# Altium PCB Main.PcbDoc
Units mil, origin at the board's own origin, x right, y up, seen from the top; angles counter-clockwise.
Board outline 900 x 2810 mil, 2 copper layers (Top Layer, Bottom Layer); 34 components, 43 nets, 176 pads, 34 vias.
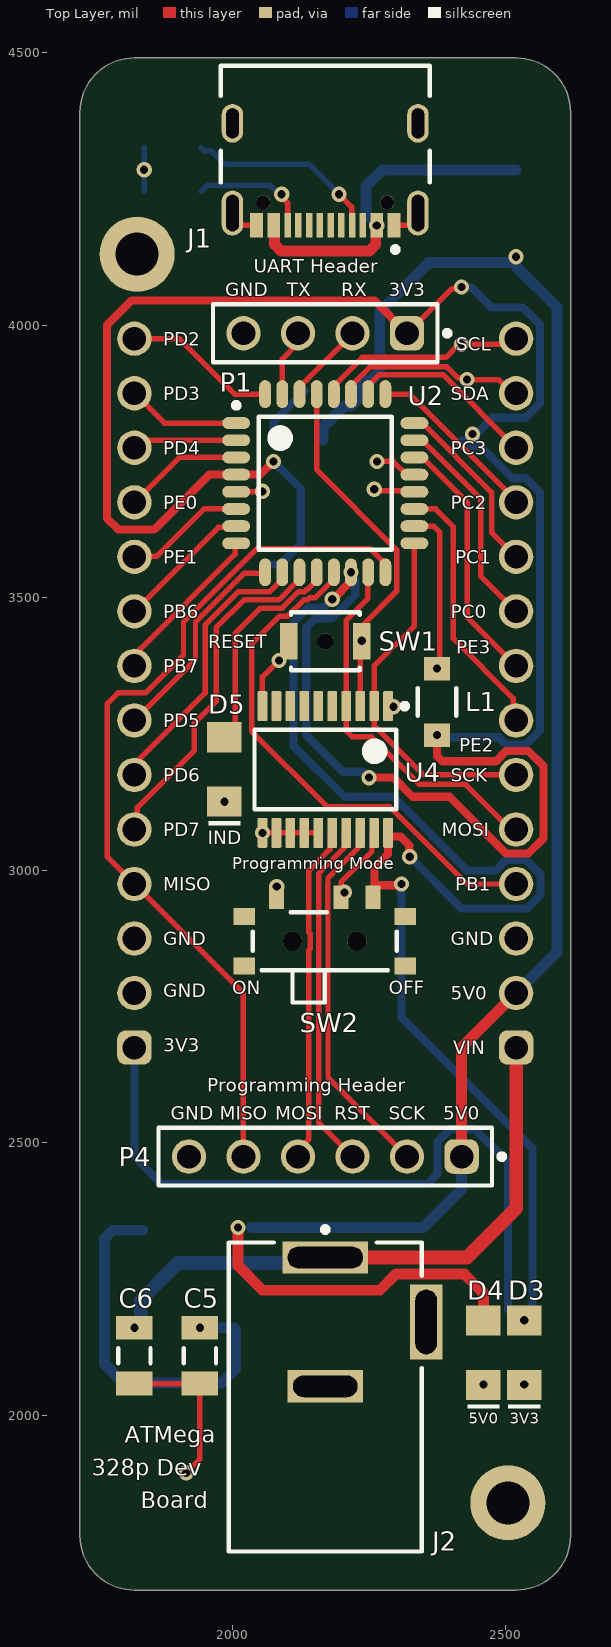
[diagram p0: Top Layer view]
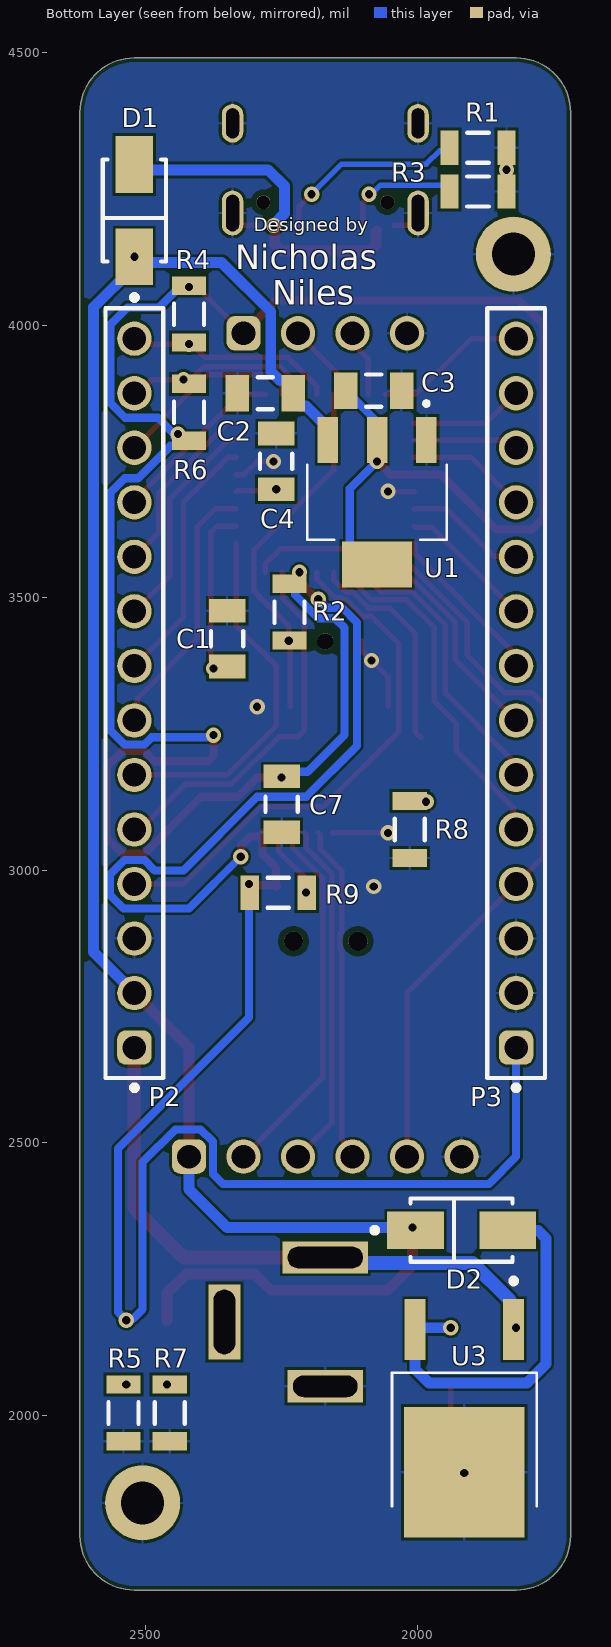
[diagram p1: Bottom Layer view, seen from below]
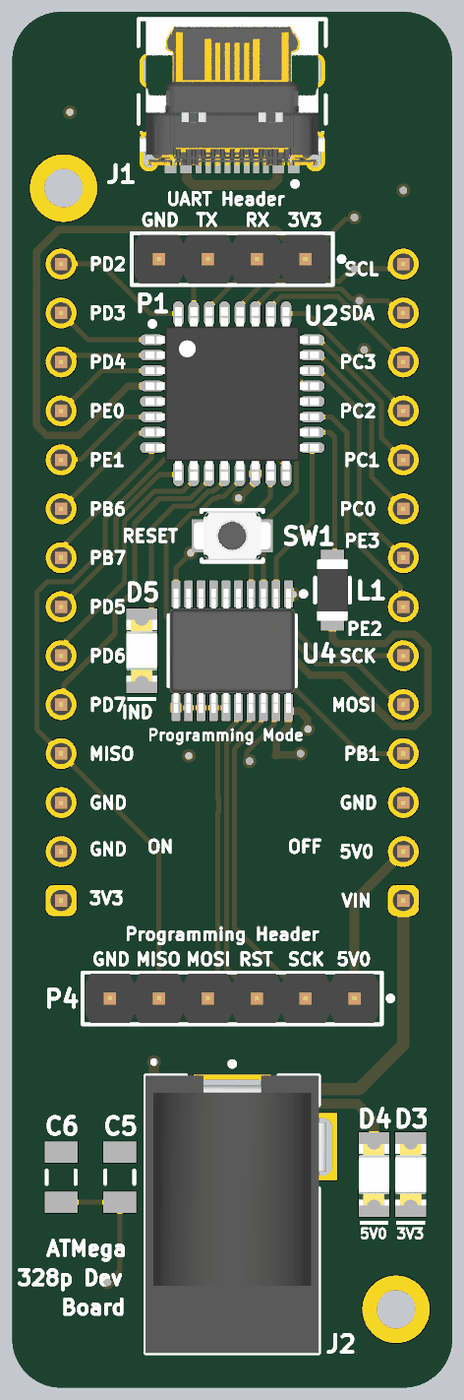
[diagram p2: 3D render of the assembled board from above, using the file's embedded part models]

## Layer stack, top to bottom
Top Solder: solder mask 0.4, Solder Resist, Dk 3.5
Top Layer: signal copper 1.4
Dielectric 1: dielectric 12.6, FR-4, Dk 4.8
Bottom Layer: signal copper 1.4
Bottom Solder: solder mask 0.4, Solder Resist, Dk 3.5

## Board outline
1720,1780 1720,4390 cw(c1820,4390) 1820,4490 2520,4490 cw(c2520,4390) 2620,4390 2620,1780 cw(c2520,1780) 2520,1680 1820,1680 cw(c1820,1780)

## Design rules (kind name [scope] priority, off if disabled: settings)
BoardOutlineClearance [All] p1: gap=7.87 ignorepadtopadclearanceinfootprint=FALSE
Clearance [All] p1: gap=5 ignorepadtopadclearanceinfootprint=TRUE except(10: Arc-Hole Track-Hole SMDPad-Hole THPad-Hole Via-Hole Fill-Hole Poly-Hole Region-Hole Text-Hole)
ComponentClearance [All] p1: gap=5 collisioncheckmode=3 verticalgap=5 showdistances=TRUE
DiffPairsRouting [All] p1: maxlimit=10 minlimit=5 mostfreqgap=5 toplayer_minwidth=5 toplayer_maxwidth=1000 toplayer_prefwidth=5 bottomlayer_minwidth=5 bottomlayer_maxwidth=1000 bottomlayer_prefwidth=5 maxuncoupledlength=500
Height [All] p1: minheight=0 maxheight=71497.94 prefheight=500
HoleSize [All] p1: absolutevalues=TRUE maxlimit=248.03 minlimit=11.81 maxpercent=80.000 minpercent=20.000
HoleToHoleClearance [All] p1: gap=10 allowstackedmicrovias=FALSE
MinimumAnnularRing [All] p1: minimumring=6
MinimumSolderMaskSliver [All] p1: minsoldermaskwidth=6
PlaneClearance [All] p1: clearance=5
PlaneConnect PlaneConnectPowerPads [InPadClass('PowerPads')] p1: planeconnectstyle=Direct reliefexpansion=20 reliefentries=4 reliefconductorwidth=10 reliefairgap=10
PlaneConnect [All] p2: pad.planeconnectstyle=Relief pad.reliefexpansion=11.81 pad.reliefentries=4 pad.reliefconductorwidth=5 pad.reliefairgap=5 via.planeconnectstyle=Direct via.reliefexpansion=11.81 via.reliefentries=4 via.reliefconductorwidth=5 via.reliefairgap=5
PolygonConnect PolygonConnectPowerPads [All vs (InPadClass('PowerPads'))] p1: connectstyle=Direct reliefconductorwidth=10 reliefentries=4 polygonreliefangle="90 Angle" airgapwidth=10
PolygonConnect [All] p2: thpad.connectstyle=Relief thpad.reliefconductorwidth=5 thpad.reliefentries=4 thpad.polygonreliefangle="90 Angle" thpad.airgapwidth=5 smdpad.connectstyle=Relief smdpad.reliefconductorwidth=5 smdpad.reliefentries=4 smdpad.polygonreliefangle="90 Angle" smdpad.airgapwidth=5 via.connectstyle=Direct via.reliefconductorwidth=5 via.reliefentries=4 via.polygonreliefangle="90 Angle" via.airgapwidth=5
RoutingVias [All] p1: holewidth=11.81 width=23.62 viastyle="Through Hole" minholewidth=11.81 minwidth=23.62 maxholewidth=23.62 maxwidth=259.84
SilkToSilkClearance [All] p1: silktosilkclearance=5
SilkToSolderMaskClearance [IsPad] p1: minsilkscreentomaskgap=5 clearancetoexposedcopper=TRUE
SolderMaskExpansion [All] p1: expansion=2 istentingtop=FALSE
SupplyNets "Schematic Supply Nets_3" [InNet('3V3')] p1: voltage=0.000
SupplyNets "Schematic Supply Nets_2" [InNet('VIN')] p2: voltage=0.000
SupplyNets "Schematic Supply Nets_1" [InNet('GND')] p3: voltage=0.000
SupplyNets "Schematic Supply Nets" [InNet('5V0')] p4: voltage=0.000
UnRoutedNet [All] p1: checkbadconnections=TRUE
Width Width_10mil [All] p1: maxlimit=1000 minlimit=10 preferedwidth=10 minimp=50.000000 maximp=50.000000 favimp=50.000000
Width Width_6mil [All] p2: maxlimit=1000 minlimit=6 preferedwidth=6 minimp=50.000000 maximp=50.000000 favimp=50.000000
Width Power_20mil [All] p3: maxlimit=1000 minlimit=20 preferedwidth=20 minimp=50.000000 maximp=50.000000 favimp=50.000000
Width Power_12mil [All] p4: maxlimit=1000 minlimit=12 preferedwidth=12 minimp=50.000000 maximp=50.000000 favimp=50.000000
Width Width_5mil [All] p5: maxlimit=1000 minlimit=5 preferedwidth=5 minimp=50.000000 maximp=50.000000 favimp=50.000000
19 further rules are at their usual default settings.

## Components (designator, comment, footprint, x,y, rotation, side; value= is the part's Value field where it differs from the comment)
C1 "0.1µF" CAPC3216X100X50LL20T25 2350,3425 r270 bottom
C2 "1µF" CAPC3216X110X50LL20T25 2280,3875 r180 bottom
C3 "1µF" CAPC3216X110X50LL20T25 2081.18,3880 r0 bottom
C4 "0.1µF" CAPC3216X100X50LL20T25 2260,3750 r90 bottom
C5 "1µF" CAPC3216X110X50LL20T25 1940,2110 r90 top
C6 "1µF" CAPC3216X110X50LL20T25 1820,2110 r90 top
C7 "0.1µF" CAPC3216X100X50LL20T25 2250,3121.18 r270 bottom
D1 "SS14" FP-403AE-MFG 2520,4210 r270 bottom
D2 "SS14" FP-403AE-MFG 1920,2340 r0 bottom
D3 "150120GS75000" WL-SMCW_1206_150120xx75000 2535,2115 r90 top
D4 "150120GS75000" WL-SMCW_1206_150120xx75000 2460,2115 r90 top
D5 "150120GS75000" WL-SMCW_1206_150120xx75000 1985,3185 r90 top
J1 "USB4105-GF-A" FP-USB4105-GF-A-MFG 2169.92,4324.13 r180 top
J2 "PJ-002A" CUI-PJ-002A_V 2170,2171.89 r270 top
L1 "10µH" WE-MI_1206_L3.2W1.6H1.1 2375,3308.98 r270 top
P1 "61300411121" 61300411121 2170,3985 r180 top locked
P2 "61301411121" 61301411121 2520,3325 r90 bottom
P3 "61301411121" 61301411121 1820,3325 r90 bottom
P4 "61300611121" 61300611121 2170,2475 r180 top locked
R1 "5.1kΩ" RESC3116X65X40LL10T20 1890,4325 r0 bottom
R2 "10kΩ" RESC3116X65X40LL10T20 2235.47,3473.46 r90 bottom
R3 "5.1kΩ" RESC3116X65X40LL10T20 1890,4245 r180 bottom
R4 "10kΩ" RESC3116X65X40LL10T20 2420,4020 r90 bottom
R5 "620Ω" RESC3116X65X40LL10T20 2540,2005 r270 bottom
R6 "10kΩ" RESC3116X65X40LL10T20 2420,3840 r270 bottom
R7 "1kΩ" RESC3116X65X40LL10T20 2455,2005 r270 bottom
R8 "620Ω" RESC3116X65X40LL10T20 2015,3075 r270 bottom
R9 "10kΩ" RESC3116X65X40LL10T20 2256.26,2958.7 r0 bottom
SW1 "EN" FP-B3U-1000P-B-MFG 2170,3420 r180 top
SW2 "450404015514" 450404015514 -47830.94,-47130 r180 top
U1 "TLV1117LV33DCYR" VREG_TLV1117LV33DCYR 2075,3675 r270 bottom
U2 "ATMEGA328PB-AU" ATML-32A_L 2170,3710 r0 top locked
U3 "VIN->5V0" DPAK229P990X238-4N 1915,1995 r0 bottom
U4 "SN74LVC245APWRG3" PW0020A_N 2170,3185 r270 top locked

## Footprints (in the part's own frame and the unit in brackets; to place one, negate y for a bottom-side part, rotate by r counter-clockwise, add the part's x,y. Pads: shape width x height; smd on the part's side, far side on the other; paste and mask are expansions set on the pad)
61300411121 [mm] "Pin Header, pitch 2.54 mm, THT, Vertical, single row, 4p"
  rrect50% 1.6x1.6 hole 1.1: 1(-3.81,0)
  round 1.6 hole 1.1: 2(-1.27,0) 3(1.27,0) 4(3.81,0)
  silkscreen extent -5.8,-1.35 5.23,1.35, body extent -5.08,-1.27 5.08,1.27, height 8.57
61300611121 [mm] "Pin Header, pitch 2.54 mm, THT, Vertical, single row, 6p"
  rrect50% 1.6x1.6 hole 1.1: 1(-6.35,0)
  round 1.6 hole 1.1: 2(-3.81,0) 3(-1.27,0) 4(1.27,0) 5(3.81,0) 6(6.35,0)
  silkscreen extent -8.34,-1.35 7.77,1.35, body extent -7.62,-1.27 7.62,1.27, height 8.57
61301411121 [mm] "Pin Header, pitch 2.54 mm, THT, Vertical, single row, 14p"
  rrect50% 1.6x1.6 hole 1.1: 1(-16.51,0)
  round 1.6 hole 1.1: 2(-13.97,0) 3(-11.43,0) 4(-8.89,0) 5(-6.35,0) 6(-3.81,0) 7(-1.27,0) 8(1.27,0) 9(3.81,0) 10(6.35,0) 11(8.89,0) 12(11.43,0) 13(13.97,0) 14(16.51,0)
  silkscreen extent -18.5,-1.35 17.93,1.35, body extent -17.78,-1.27 17.78,1.27, height 8.57
450404015514 [mm] "Right angle Slide Switch"
  rect 0.7x1.1 smd: COM(-1270.75,-1272.05) L1(-1267.75,-1272.05) L2(-1272.25,-1272.05)
  round 0.9 hole 0.9 unplated: M1(-1271.5,-1270) M2(-1268.5,-1270)
  rect 1x0.8 smd: M3(-1273.75,-1268.85) M4(-1266.25,-1268.85) M5(-1273.75,-1271.15) M6(-1266.25,-1271.15)
  silkscreen extent -1273.35,-1271.35 -1266.65,-1267.15, body extent -1273.85,-1272.25 -1266.15,-1267.12, height 1.4
ATML-32A_L [mm] "TQFP, 32-Leads, Body 7x7mm, Pitch 0.8mm, IPC High Density"
  oval 1.3x0.55 smd: 1(-4.15,2.8) 2(-4.15,2) 3(-4.15,1.2) 4(-4.15,0.4) 5(-4.15,-0.4) 6(-4.15,-1.2) 7(-4.15,-2) 8(-4.15,-2.8) 17(4.15,-2.8) 18(4.15,-2) 19(4.15,-1.2) 20(4.15,-0.4) 21(4.15,0.4) 22(4.15,1.2) 23(4.15,2) 24(4.15,2.8)
  oval 0.55x1.3 smd: 9(-2.8,-4.15) 10(-2,-4.15) 11(-1.2,-4.15) 12(-0.4,-4.15) 13(0.4,-4.15) 14(1.2,-4.15) 15(2,-4.15) 16(2.8,-4.15) 25(2.8,4.15) 26(2,4.15) 27(1.2,4.15) 28(0.4,4.15) 29(-0.4,4.15) 30(-1.2,4.15) 31(-2,4.15) 32(-2.8,4.15)
  silkscreen extent -4.27,-3.1 3.1,3.75, body extent -4.5,-4.5 4.5,4.5, height 1.2
CAPC3216X100X50LL20T25 [mm] "Chip Capacitor, 2-Leads, Body 3.4x1.8mm, IPC High Density"
  rect 1.1x1.7 smd: 1(-1.3,0) 2(1.3,0)
  silkscreen extent -0.35,-0.75 0.35,0.75, body extent -1.7,-0.9 1.7,0.9, height 1
CAPC3216X110X50LL20T25 [mm] "Chip Capacitor, 2-Leads, Body 3.20x1.60mm, IPC High Density"
  rect 1.1x1.7 smd: 1(-1.3,0) 2(1.3,0)
  silkscreen extent -0.35,-0.75 0.35,0.75, body extent -1.7,-0.9 1.7,0.9, height 1.1
CUI-PJ-002A_V [mm] "THD, 3-Leads, Body 14.4x9mm, Height 11mm"
  rect 1.5x4 hole 1 slot 3.5 at 90 deg: 1(-3,0)
  rect 1.5x3.5 hole 1 slot 3 at 90 deg: 2(3,0)
  rect 3.5x1.5 hole 1 slot 3 at 0 deg: 3(0,4.7)
  silkscreen extent -4.42,-4.5 10.7,4.5, body extent -3.7,-4.5 10.7,4.9, height 11
DPAK229P990X238-4N [mm]
  rect 0.97x2.83 smd: 1(-2.29,-4.14) 3(2.29,-4.14)
  rect 5.63x6.09 smd paste-4: 2(0,2.51)
  silkscreen extent -3.37,-6.5 3.37,4.09
FP-403AE-MFG [mm]
  rect 2.65x1.75 smd paste+0 mask+0: 1(-2.15,0) 2(2.15,0)
  silkscreen extent -2.37,-1.48 4.17,1.48, body extent -2.6,-1.36 2.6,1.36, height 2.5
FP-B3U-1000P-B-MFG [mm]
  rect 0.8x1.7 smd paste+0 mask+0: 1(-1.7,0) 2(1.7,0)
  round 0.75 hole 0.75 unplated paste-2539.97 mask+0: ""(0,0)
  silkscreen extent -1.6,-1.35 1.6,1.35, body extent -2.2,-1.45 2.2,1.45, height 0.25
FP-USB4105-GF-A-MFG [mm]
  rrect100% 1x2.1 hole 1.7 slot 0.6 at 0 deg paste-2539.97 mask+0: 1(-4.32,3.015) 2(4.32,3.015)
  rrect100% 1x1.8 hole 1.4 slot 0.6 at 0 deg paste-2539.97 mask+0: 3(-4.32,-1.165) 4(4.32,-1.165)
  rect 0.6x1.15 smd paste+0 mask+0: A1-B12(-3.2,3.59) A4-B9(-2.4,3.59) B1-A12(3.2,3.59) B4-A9(2.4,3.59)
  rect 0.3x1.15 smd paste+0 mask+0: A5(-1.25,3.59) A6(-0.25,3.59) A7(0.25,3.59) A8(1.25,3.59) B5(1.75,3.59) B6(0.75,3.59) B7(-0.75,3.59) B8(-1.75,3.59)
  round 0.65 hole 0.65 unplated paste-2539.97 mask+0: ""(-2.89,2.515) ""(2.89,2.515)
  silkscreen extent -4.86,-3.84 4.86,4.84, body extent -4.96,-3.94 4.96,4.27, height 0.25
PW0020A_N [mm] "SOP, 20-Leads, Body 6.6x4.5mm, Pitch 0.65mm, IPC Medium Density"
  rrect22% 1.4x0.45 smd: 1(-2.95,2.925) 2(-2.95,2.275) 3(-2.95,1.625) 4(-2.95,0.975) 5(-2.95,0.325) 6(-2.95,-0.325) 7(-2.95,-0.975) 8(-2.95,-1.625) 9(-2.95,-2.275) 10(-2.95,-2.925) 11(2.95,-2.925) 12(2.95,-2.275) 13(2.95,-1.625) 14(2.95,-0.975) 15(2.95,-0.325) 16(2.95,0.325) 17(2.95,0.975) 18(2.95,1.625) 19(2.95,2.275) 20(2.95,2.925)
  silkscreen extent -3.07,-3.3 1.85,3.83, body extent -3.21,-3.25 3.21,3.25, height 1
RESC3116X65X40LL10T20 [mm] "Chip Resistor, 2-Leads, Body 3.10x1.60mm, IPC High Density"
  rect 0.85x1.6 smd: 1(-1.325,0) 2(1.325,0)
  silkscreen extent -0.5,-0.7 0.5,0.7, body extent -1.6,-0.85 1.6,0.85, height 0.65
VREG_TLV1117LV33DCYR [mm]
  rect 2.15x0.95 smd: 1(-2.9,2.3) 2(-2.9,0) 3(-2.9,-2.3)
  rect 2.15x3.25 smd: 4(2.9,0)
  silkscreen extent -4.7,-3.25 1.75,3.25, body extent -3.5,-3.25 3.5,3.25, height 1.8
WE-MI_1206_L3.2W1.6H1.1 [mm] "SMD Multilayer Inductor, body 3.2x1.6mm"
  rect 1.1x1.2 smd: 1(-1.55,0) 2(1.55,0)
  silkscreen extent -0.65,-0.9 0.65,0.9, body extent -1.6,-0.8 1.6,0.8, height 1.1
WL-SMCW_1206_150120xx75000 [mm] "SMD Mono-color Chip LED, body 3.2x1.6mm"
  rect 1.4x1.6 smd: 1(-1.5,0) 2(1.5,0)
  silkscreen extent -2.6,-0.75 -2.4,0.75, body extent -1.6,-0.8 1.6,0.8, height 0.68

## Part data
C1 C4 C7: library part CMP-1664-00001-4, "Chip Capacitor, 100 nF, +/- 10%, 25 V, -55 to 125 degC, 1206 (3216 Metric), RoHS, Tape and Reel", Manufacturer=Kemet, Max Operating Temperature="125 degC", Min Operating Temperature="-55 degC", Package Quantity=4000, Voltage Rating="25 V", ComponentLink1Description="Manufacturer URL", ComponentLink1URL=http://www.kemet.com/, ComponentLink2Description=Datasheet, ComponentLink2URL=http://www.kemet.com/docfinder?Partnumber=C1206F104K3RACTU, DatasheetVersion=02/2016, Height="0.78 mm", Length="3.2 mm", Mounting Technology="Surface Mount", PackageDescription="2-Pin Surface Mount Device, Body 3.2 x 1.6 mm", PackageReference=1206, Packaging="Tape and Reel", REACH SVHC="No SVHC", RoHSCompliant=true
C2 C3 C5 C6: library part CMP-2000-06011-1, "Chip Capacitor, 1 uF, +/- 10%, 50 V, -55 to 125 degC, 1206 (3216 Metric), RoHS, Tape and Reel", Capacitance=1uF, Capacitance - nF=1000nF, Case Code - in=1206, Case Code - mm=3216, Case Height=1mm, Case Length=3.2mm, Case Width=1.6mm, Dielectric=X7R, Manufacturer=Kemet, Maximum Operating Temperature=+125C, Minimum Operating Temperature=-55C, Operating Temperature Range=-55Cto+125C, Package / Case=1206(3216metric), Package Description="2-Pin Surface Mount Device, Body 3.2 x 1.6 mm", Temperature Coefficient / Code=+/-15%, Tolerance=10%, Voltage Rating=50V, Brand=Kemet, Class=Class1, Datasheet URL=http://www.kemet.com/docfinder?Partnumber=C1206C105K5RACTU, Datasheet Version=02/2016, Dimensions=1.6mmWx3.2mmLx1mmH, Factory Pack Quantity=2500, Manufacturer URL=http://www.kemet.com/, Mounting Technology=SurfaceMount, Package Reference=1206, Packaging=Reel, Product=GeneralTypeMLCCs, Product Category=MultilayerCeramicCapacitorsMLCC-SMD/SMT, RoHS=Details, Series=C1206C, Termination Style=SMD/SMT, Type=SMDMLCCX7R6.3-250VDCCommericalGrade, Voltage Rating Dc=50V
D1 D2: library part CMP-2000-04943-2, "DIODE SCHOTTKY 40V 1A SMA", Forward Current=1A, Manufacturer="ON Semiconductor", Max Junction Temp=+125°C, Max Repetitive Reverse Voltage=40V, Max Surge Forward Current=40A, Package=403AE, Peak Reverse Current=0.2mA, Temperature="-65°C to +125°C", Temperature Range Low=-65°C, Automotive=No, Category=Diode, ComponentLink2Description=Datasheet, ComponentLink2URL=https://www.onsemi.com/pub/Collateral/SS19-D.PDF, Device Class L1="Discrete Semiconductors", Device Class L2=Diodes, Device Class L3="Schottky Diodes", Digikey Description="DIODE SCHOTTKY 40V 1A SMA", Height=2.5mm, Lead Free=Yes, Manufacturer Part Number=SS14, Mouser Description="Schottky Diodes & Rectifiers SMA 40V 1.0A", Octopart=https://octopart.com/ss14-on+semiconductor-29205033, RoHS=TRUE, Standoff Height=0.05mm, Temperature Range High=+125°C
D3 D4 D5: library part CMP-1426-00014-4, "WL-SMCW SMT Mono-Color Chip LED Waterclear", Case Code (Imperial)=1206, Case Code (Metric)=3216, Color=Green, Forward Current=100mA, Forward Voltage=3.2V, Max Junction Temperature (Tj)=95°C, Max Operating Temperature=85°C, Max Reverse Voltage (DC)=5V, Min Operating Temperature=-40°C, Power Dissipation=105mW, Test Current=20mA, Case/Package=1206, Dominant Wavelength=525nm, Height=680µm, Length=3.2mm, Lens Style="Clear, Rectangular", Luminous Intensity=450mcd, Mount="Surface Mount", Packaging="Tape and Reel", Peak Wavelength=515nm, REACH SVHC=Unknown, Reverse Voltage=5V, RoHS=Compliant, Viewing Angle=140°, Wavelength=525nm, Width=1.6mm
J1: library part CMP-245163-000001-1, "CONN RCPT USB2.0 TYPEC 5A", Current Rating=5/6.25/1.25/0.25A, Manufacturer=GCT, Package=0, Temperature="-40°C to +85°C", Temperature Range High=+85°C, Temperature Range Low=-40°C, Voltage Rating=20V, Automotive=No, Category=Conn, ComponentLink2Description=Datasheet, ComponentLink2URL=https://gct.co/files/drawings/usb4105.pdf, Conn Orientation="Right Angle", Contact Material=Gold,Nickel, Device Class L1=Connectors, Device Class L2="USB Connectors", Device Class L3=unset, Digikey Description="CONN RCPT USB2.0 TYPEC 5A", Height=3.46mm, Is Female=yes, Lead Free=Yes, Manufacturer Part Number=USB4105-GF-A, Number of Contacts=16, Octopart=https://octopart.com/usb4105-gf-a-gct-106627878, RoHS=TRUE, Usb Standard="USB 2.0"
J2: library part CMP-2000-06895-2, "Through Hole Right Angle DC Power Jack, 2.5 A, 2 mm Center Pin, 3 Position, -25 to 85 degC, RoHS, Bulk", Current Rating=2.5A, Flammability Rating=UL94V-0, Insulation Resistance=50MOhms, Manufacturer=CUIInc., Operating Temperature Range=-25Cto+85C, Package Description="3-Pin Through Hole Device, Body 14.4 x 9 mm, Height 11 mm", Voltage Rating=24V, Brand=CUI, Connector Type=DCPowerJack, Contact Gender=Male, Contact Material=Copper, Contact Plating=Nickel, Datasheet URL=http://www.cui.com/product/resource/pj-002a.pdf, Datasheet Version="Rev. 1.03, 04/2016", Factory Pack Quantity=500, Housing Material=PolybutyleneTerephthalate(PBT), Inside Contact Diameter=2mm, Manufacturer URL=http://www.cui.com/, Mounting Angle=Right, Mounting Style=ThroughHole, Mounting Technology=ThroughHole, Outside Contact Diameter=6.5mm, Package Reference=PJ-002A, Product=Jacks, Product Category=DCPowerConnectors, RoHS=True, Termination Style=ThroughHole
L1: library part CMP-0221-00030-2, Ambient Temperature Range High=85°C, Ambient Temperature Range Low=-55°C, Case/Package=SMD/SMT, Current Rating=25mA, DC Resistance (DCR)=500mΩ, Inductance Tolerance=10%, Max Operating Temperature=125°C, Self Resonant Frequency=26MHz, Core Material=Ferrite, Depth=1.6mm, Height=1.1mm, Inductance=10µH, Length=3.2mm, Max DC Current=25mA, Min Operating Temperature=-55°C, NexarPartId=23259292, RoHS=Compliant, Shielding=Unshielded, Tolerance=10%, Width=1.6mm
P1: "WR-PHD Pin Header, THT, Vertical, pitch 2.54mm, 1 Row, 4P", Contact Resistance=20mOhm, Manufacturer="Wurth Elektronik", Operating Temperature Max=105°C, Operating Temperature Min=-40°C, Rated Current=3A, Withstanding Voltage=500V, Working Voltage=250V, Category="Board-to-Board Connectors", ComponentLink1Description="Website Link", ComponentLink1URL=https://www.we-online.com/redexpert/article/61300411121?ad, ComponentLink2Description="Datasheet Link", ComponentLink2URL=https://www.we-online.com/redexpert/spec/61300411121?ad, Gender="Pin Header", Manufacturer Part Number=61300411121, Match Code=WR-PHD, Mount="Through Hole", Number of Pins=4, Number of Rows=1, Orientation=Vertical, Packaging=Bag, Pitch=2.54mm
P2 P3: library part CMP-1502-01091-3, Color=Black, Contact Resistance=20mΩ, Current Rating=3A, Max Operating Temperature=105°C, Min Operating Temperature=-40°C, Operating Supply Voltage=250V, Connector Type="Male Pin", Contact Material=Copper, Contact Mating Length=5.9944mm, Contact Plating=Gold, Gender=Male, Height=8.89mm, Lead Free="Lead Free", Lead Pitch=2.54mm, Mount="Through Hole", NexarPartId=32855543, Number of Contacts=14, Number of Pins=14, Number of Positions=14, Number of Rows=1, Orientation=Vertical, Packaging=Bulk, Pitch=2.54mm, REACH SVHC=Unknown, RoHS=Compliant, Termination=Solder, Voltage Rating=250V
P4: library part CMP-1502-01070-3, Color=Black, Contact Resistance=20mΩ, Current Rating=3A, Max Operating Temperature=105°C, Min Operating Temperature=-40°C, Operating Supply Voltage=250V, Connector Type="Male Pin", Contact Gender=Male, Contact Material=Copper, Contact Mating Length=5.9944mm, Contact Plating=Gold, Gender=Male, Height=8.89mm, Housing Material=PBT, Lead Free="Lead Free", Lead Pitch=2.54mm, Mount="Through Hole", NexarPartId=20084590, Number of Contacts=6, Number of Pins=6, Number of Positions=6, Number of Rows=1, Orientation=Vertical, Packaging=Bulk, Pitch=2.54mm, REACH SVHC=Unknown, RoHS=Compliant, Termination="Through Hole", Voltage Rating=250V
R1 R3: library part CMP-2003-03990-1, Manufacturer=Yageo, Part Number=RC1206JR-075K1L
R2 R4 R6 R9: library part CMP-1014-00623-2, "Chip Resistor, 10 KOhm, +/- 1%, 0.25 W, -55 to 155 degC, 1206 (3216 Metric), RoHS, Tape and Reel", Case Code (Imperial)=1206, Case Code (Metric)=3216, Manufacturer=Yageo, Max Operating Temperature=155degC, Min Operating Temperature=-55degC, Package Description="2-Pin Surface Mount Device, Body 3.1 x 1.6 mm", Package Quantity=5000, Package Reference=1206.0, Power Rating=250mW, Resistance=10KOhm, Temperature Coefficient=100ppm/degreesC, Tolerance=1%, Voltage Rating=200V, Case/Package=1206, Composition=ThickFilm, Datasheet URL=http://www.yageo.com/NewPortal/yageodocoutput?fileName=/pdf/R-Chip/PYu-RC_Group_51_RoHS_L_5.pdf, Datasheet Version="Rev. 5, 10/2016", Depth=1.6mm, Height=0.55mm, Lead Free=LeadFree, Length=3.1mm, Manufacturer URL=http://www.yageo.com/, Military Standard=Not, Packaging=TapeandReel, REACH SVHC=Unknown, RoHSCompliant=true, Termination=SMD/SMT, Width=1.6mm
R5 R8: library part CMP-2003-03994-1, Manufacturer=Yageo, Part Number=RC1206JR-07620RL
R7: library part CMP-2100-03678-1, "Chip Resistor, 1 KOhm, +/- 1%, 0.25 W, -55 to 155 degC, 1206 (3216 Metric), RoHS, Tape and Reel", Case Code (Imperial)=1206, Case Code (Metric)=3216, Manufacturer=Yageo, Max Operating Temperature=155degC, Min Operating Temperature=-55degC, Package Description="2-Pin Surface Mount Device, Body 3.1 x 1.6 mm", Package Reference=1206.0, Power Rating=250mW, Resistance=1KOhm, Temperature Coefficient=100ppm/degreesC, Tolerance=1%, Voltage Rating=200V, Case/Package=1206, Composition=ThickFilm, Datasheet URL=http://www.yageo.com/NewPortal/yageodocoutput?fileName=/pdf/R-Chip/PYu-RC_Group_51_RoHS_L_5.pdf, Datasheet Version="Rev. 5, 10/2016", Depth=1.6mm, Height=0.55mm, Lead Free=LeadFree, Length=3.1mm, Manufacturer URL=http://www.yageo.com/, Military Standard=Not, Packaging=TapeandReel, REACH SVHC=Unknown, RoHSCompliant=true, Termination=SMD/SMT
SW1: library part CMP-08834-000005-1, "SWITCH TACTILE SPST-NO 0.05A 12V", Ambient Temperature Range High=+70°C, Ambient Temperature Range Low=-25°C, Contact Current Rating=50mA, Contact Resistance=100mΩ, Manufacturer=Omron, Manufacturer Part Number=B3U-1000P-B, Operating Force=1.5N, Package=0, Temperature="-25°C to +70°C", Voltage Rating Dc=12V, Automotive=No, Category=Switch, ComponentLink2Description=Datasheet, ComponentLink2URL=https://omronfs.omron.com/en_US/ecb/products/pdf/en-b3u.pdf, Device Class L1=Electromechanical, Device Class L2=Switches, Device Class L3="Tactile Switches", Digikey Description="SWITCH TACTILE SPST-NO 0.05A 12V", Electromechanical Life=200000Cycles, Height=1.75mm, Lead Free=Yes, Mount="Surface Mount", Mouser Description="Tactile Switches Top Actuated with boss w/o ground", Octopart=https://octopart.com/b3u-1000p-b-omron-1057356, RoHS=TRUE, Temperature Range High=+70°C, Temperature Range Low=-25°C, Throw Configuration=SPST-NO
SW2: library part CMP-03913-99472344-1, "450404015514 Slide Switch, 0.3A, 5Vdc, Smd Rohs Compliant: Yes", Current Rating=300mA, Insulation Resistance=100MΩ, Max Operating Temperature=85°C, Min Operating Temperature=-40°C, Voltage Rating=5V, Contact Plating=Silver, NexarPartId=99472344, Packaging="Tape and Reel", RoHS=Compliant
U1: "1-A, low-dropout voltage regulator", Package="SOT-223-4 Texas Instruments", Check_prices=https://www.snapeda.com/parts/TLV1117LV33DCYR/Texas+Instruments/view-part/?ref=eda, Digi-Key_Part_Number=296-28778-2-ND, MF="Texas Instruments", MP=TLV1117LV33DCYR, Purchase-URL=https://pricing.snapeda.com/search/part/TLV1117LV33DCYR/?ref=eda, SnapEDA_Link=https://www.snapeda.com/parts/TLV1117LV33DCYR/Texas+Instruments/view-part/?ref=snap
U2: library part CMP-2000-07439-1, "AVR Microcontroller, 1.8 to 5.5 V, 32 KB Flash, 1 KB EEPROM, 2 KB SRAM, -40 to 85 degC, 32-Pin TQFP (32A), RoHS, Tray", Manufacturer=Microchip, Package Description="32-Pin Thin Profile Plastic Quad Flat Package, Body 7 x 7 mm, Pitch 0.8 mm", Package Reference=32A, Datasheet URL=http://ww1.microchip.com/downloads/en/DeviceDoc/40001906A.pdf, Datasheet Version="Rev. A, 04/2017", Manufacturer URL=http://www.microchip.com/, Mounting Technology=SurfaceMount, RoHSCompliant=false
U3: library part MC7805BDTRKG, "Linear Voltage Regulator IC 1 Output 1A DPAK", Package="TO-252-3 Freescale Semiconductor", Availability=Unavailable, MF="ON Semiconductor", MP=MC7805BDTRKG, Price=None, SnapEDA_Link=https://www.snapeda.com/parts/MC7805BDTRKG/ON%20Semiconductor/view-part/360207/?ref=snap
U4: library part CMP-1620-00520-2, "Octal Bus Transceiver With 3-State Outputs, PW0020A, LARGE T&R", F @ Nom Voltage(Max)(Mhz)=100, Generic Part Number=SN74LVC245A, ICC @ Nom Voltage(Max)(mA)=0.03, Manufacturer="Texas Instruments", Operating Temperature Range(C)="-40 to 125", Rating=Catalog, tpd @ Nom Voltage(Max)(ns)=12.7,8.3,7.3,6.3, Voltage(Nom)(V)=1.8,2.5,2.7,3.3, Bits(#)=8, Code_JEDEC=MO-153, DatasheetVersion=SCAS218X, Input Type=TTL/CMOS, Output Drive (IOL/IOH)(Max)(mA)=-24/24, Output Type=LVTTL, PackageReference=PW0020A, Schmitt Trigger=No, Technology Family=LVC, VCC(Max)(V)=3.6, VCC(Min)(V)=1.65

## Free pads (board coordinates)
  round 137.79 hole 78.74: 7(1825,4130) 7(2505,1840)

## Via types
v1: diameter 28, hole 15, Top Layer to Bottom Layer, tented both sides, 34 vias

## Nets (pads, with @x,y where several pads share a name; then routed paths per layer and width w, separated by ;. In a path a pad name is that pad's centre, name@x,y a point inside that pad or via, vN(x,y) a via of type N, cw(c..) or ccw(c..) an arc to the next point about the centre after c; other vN are vias at no path point)
3V3: C3.2 C7.1 D3.2 L1.2 P1.1 P3.1 R2.2 R4.2 R6.2 R9.2 SW2.L2 U1.2 U1.4 U2.4 U2.14 U4.20 | length 8131.3
  Top Layer w10: P1.1 2401.56,4066.56 2416.56,4066.56 v1(2420,4070)
  Top Layer w15: v1(2075,3750) 2050.75,3725.75 U2.4 1957.4,3725.75 1856.48,3624.83 1790.43,3624.83 1770,3645.25 1770,4000 1815,4045 2260,4045 P1.1 ; v1(2182.9,3497.1) 2183.99,3497.1 2217.24,3530.36 v1(2217.24,3546.61) ; v1(2250,3170) 2295,3170 2330,3135 2397.78,3135 2501.78,3031 2542.22,3031 2570,3058.79 2570,3191.21 2542.22,3219 2501.78,3219 2482.78,3200 2385,3200 2375,3210 v1(2375,3247.95) ; SW2.L2@2258.22,2970.44 2260.46,2972.68 ; SW2.L2@2260,2970 2260.46,2970.46 2260.46,2972.68 ; U4.20@2285.16,3063.25 U4.20 ; v1(2310,2975) 2307.72,2972.72 2260.5,2972.72 2260.46,2972.68 ; v1(2324.92,3024.92) 2324.19,3025.65 2324.19,3045.81 2308.1,3061.9 2286.52,3061.9 2285.08,3060.46 2285.08,3030.08 2260.46,3005.46 2260.46,2972.68
  Bottom Layer w15: P3.1 1820,2475 1870,2425 2357.71,2425 2376,2443.29 2376,2502.45 2398.56,2525 2445,2525 2505,2465 2505,2195 2522.51,2177.49 2532.51,2177.49 v1(2535,2175) 2535,2175.29 2550,2190.29 2550,2490 2310,2730 2310,2957.13 R9.2 2308.43,2973.43 v1(2310,2975) ; U1.4 2087.68,3560.83 2125,3598.15 2125,3700 v1(2075,3750) ; U1.2 2075,3822.64 C3.2 ; v1(2182.9,3497.1) 2167.54,3481.74 2138.9,3481.74 2111.9,3454.74 2111.9,3228.1 2205,3135 2295,3135 2430,3000 2482.78,3000 2501.78,3019 2538.22,3019 2565,2992.22 2565,2955 2540,2930 2420,2930 v1@2325,3025 ; v1(2217.24,3546.61) 2217.24,3541.74 2225,3533.99 2225,3505 2182.26,3462.26 2152.26,3462.26 2135,3445 2135,3248.52 2202.82,3180.7 2239.3,3180.7 v1(2250,3170) ; v1@2375,3243.98 2488.8,3243.98 2501.78,3231 2538.22,3231 2564,3256.78 2564,3693.22 2538.22,3719 2513.78,3719 2454.18,3778.6 2439.5,3778.6 R6.2@2430.27,3787.83 ; R6.2 R6.2@2425.77,3787.83 ; v1(2420,4070) 2436.93,4070 2474.54,4032.39 2532.61,4032.39 2564,4001 2564,3856.78 2537.22,3830 2476.93,3830 2446.5,3799.57 2446.5,3795 2439.33,3787.83 R6.2@2430.27,3787.83 ; v1(2440,3800) 2437.93,3800 R6.2@2425.77,3787.83 ; R6.2@2425.77,3787.83 R6.2@2430.27,3787.83
5V0: C2.2 D1.2 D2.2 D4.2 P2.2 P4.1 U1.3 | length 3422.4
  Top Layer w20: v1(2010,2345) 2010,2275 2055,2230 2270,2230 2300,2260 2425,2260 2460,2225 D4.2 ; P4.1 2420,2675 P2.2
  Bottom Layer w20: D2.2@2035,2345 2350,2345 2420,2415 P4.1 ; U1.3 2165.55,3812.8 2174.25,3821.5 2175.31,3821.5 2205.35,3851.54 2217.17,3851.54 2228.82,3863.19 C2.2 2228.82,3886.81 2240.47,3898.46 2253.28,3898.46 2270,3915.18 2270,4025 2360,4115 2509.65,4115 v1(2520,4125.35) D1.2@2520,4115.35 ; P2.2 2595,2850 2595,4032.64 D1.2@2520,4107.64
AREF: C4.1 U2.20 | length 75.3
  Top Layer w10: v1(2260,3698.82) 2262.34,3696.48 2331.16,3696.48 U2.20
AVCC: C1.2 L1.1 U2.18 | length 297.6
  Top Layer w10: U2.18 2368.74,3631.26 2380,3620 2380,3386.65 2376.02,3382.68 L1.1@2368.62,3382.68
  other v1: 2375,3370
GND: C1.1 C2.1 C3.1 C4.2 C5.1 C6.1 C7.2 J1.1 J1.2 J1.3 J1.4 J1.A1-B12 J1.B1-A12 J2.2 P1.4 P2.3 P3.2 P3.3 P4.6 pad.7 R1.1 R3.2 R5.2 R7.2 R8.2 SW1.2 SW2.L1 U1.1 U2.5 U2.21 U3.2 U4.1 U4.10 U4.11 U4.12 U4.13 U4.14 U4.15 | length 870.8
  Top Layer w10: C6.1 C5.1 1940,1920 v1(1915,1895) ; J1.2 1999.84,4196.36 2013.41,4182.8 J1.B1-A12 ; U2.5 2006.99,3694.63 2054.63,3694.63 v1(2055,3695) ; U4.11 U4.15 ; U4.10 2054.84,3354.84 v1(2085,3385) 2085.79,3385 2103.07,3402.28 SW1.2 ; v1(2265,3750) 2294.37,3750 2318.62,3725.75 U2.21 ; U4.1 2293.7,3301.14 v1(2294.92,3299.92) ; J1.A1-B12 2326.43,4182.8 2340,4196.36 J1.1
  Bottom Layer w10: R3.2 R1.1
  other v1: 2081.05,2970.44 2054.76,3068.78 1837.83,4285
LED_BUILTIN: D5.2 U2.12 | length 399.2
  Top Layer w10: D5.2@1995,3244.06 2005,3254.06 2005,3435 2051.02,3481.02 2091.1,3481.02 2121.1,3511.02 2131.38,3511.02 2135.36,3515 2137.4,3515 2154.25,3531.85 U2.12
MISO: P3.4 P4.5 U2.16 | length 1623.8
  Top Layer w10: P4.5 2020,2775 1770,3025 1770,3305.29 1790.25,3325.54 1840.54,3325.54 1910,3395 1910,3455 2045,3590 2251.61,3590 2280.24,3561.38 U2.16
MOSI: P2.5 U2.15 U4.4 | length 693.6
  Top Layer w10: U2.15 2248.31,3546.19 2248.31,3498.31 2208.39,3458.38 U4.4 2208.39,3256.61 2220,3245 2255,3245 2342.5,3157.5 2427.5,3157.5 2510,3075 P2.5
MOSI_5V: P4.4 U4.16 | length 622.1
  Top Layer w10: P4.4 2120,2487.35 2140,2507.35 2140,2853.73 2142.72,2856.45 2142.72,2883.55 2140,2886.27 2140,3000 2178.94,3038.94 2178.94,3065 U4.16
NetC5_2: C5.2 D2.1 U3.3 | length 711
  Bottom Layer w20: D2.1 1780,2340 1765,2325 1765,2095 1800,2060 1980,2060 2005.16,2085.16 U3.3 2001.97,2161.18 v1(1940,2161.18)
NetD3_1: D3.1 R5.1
  other v1: 2535,2056.89
NetD4_1: D4.1 R7.1
  other v1: 2460,2056.89
NetD5_1: D5.1 R8.1
  other v1: 1985,3125.94
NetJ1_A5: J1.A5 R1.2 | length 365.3
  Top Layer w10: v1(2195,4240) 2218.31,4216.69 2218.31,4173.7 J1.A5@2219.21,4172.8
  Bottom Layer w10: R1.2 1947.17,4320 1960,4320 1985,4295 2140,4295 v1(2195,4240)
NetJ1_B5: J1.B5 R3.1 | length 231.5
  Top Layer w10: v1(2090,4240) 2090,4235.13 2101.1,4224.03 J1.B5@2101.1,4172.8
  Bottom Layer w10: R3.1 1953.9,4256.77 2068.36,4256.77 2085.13,4240 v1(2090,4240)
OE: R9.1 SW2.COM U4.19 | length 123.4
  Top Layer w10: SW2.COM@2199.17,2970.44 2199.17,2978.32 2255.71,3034.86 2255.71,3065 U4.19
  other v1: 2205.37,2959.63
PB1: P2.4 U2.13 | length 973.9
  Top Layer w10: U2.13 2185.75,3533.89 2151.86,3500 2141.57,3500 2137.6,3496.02 2131.02,3496.02 2101.02,3466.02 2085.74,3466.02 2035,3415.28 2035,3255 2173.19,3116.81 2288.19,3116.81 2430,2975 P2.4
PB6: P3.9 U2.7 | length 251.3
  Top Layer w10: P3.9 1974.03,3629.03 2004.38,3629.03 U2.7
PB7: P3.8 U2.8 | length 302.1
  Top Layer w10: P3.8 1830.14,3385.14 1830.14,3405.14 2004.79,3579.79 2004.79,3597.94 U2.8
PC0: P2.9 U2.23 | length 399.7
  Top Layer w10: U2.23 2348.15,3788.74 2455,3681.89 2455,3540 P2.9
PC1: P2.10 U2.24 | length 331.2
  Top Layer w10: U2.24 2348.15,3820.24 2475,3693.39 2475,3620 P2.10
PC2: P2.11 U2.25 | length 323.6
  Top Layer w10: U2.25 2324.45,3873.39 2520,3677.84 P2.11
PC3: P2.12 U2.26 | length 350.1
  Top Layer w10: U2.26 2248.74,3888.15 2269.57,3908.98 2386.02,3908.98 P2.12
PD2: P3.14 U2.32 | length 281.9
  Top Layer w10: P3.14 1902.05,3975 2003.66,3873.39 U2.32
PD3: P3.13 U2.1 | length 209.3
  Top Layer w10: P3.13 1874.76,3820.24 U2.1
PD4: P3.12 U2.2 | length 192.3
  Top Layer w10: P3.12 1834.34,3775 1848.08,3788.74 U2.2
PD5: P3.7 U2.9 | length 392.6
  Top Layer w10: P3.7 1932.01,3387.01 1932.01,3455.8 2021.01,3544.79 2054.38,3544.79 2056.2,3546.61 U2.9
PD6: P3.6 U2.10 | length 517.6
  Top Layer w10: P3.6 1830.14,3185.14 1830.14,3205.14 1949.83,3324.83 1949.83,3449.83 2011.02,3511.02 2068.39,3511.02 2091.26,3533.89 U2.10
PD7: P3.5 U2.11 | length 634.4
  Top Layer w10: P3.5 1825.38,3080.38 1825.38,3115.38 1930,3220 1930,3270 1970,3310 1970,3445 2021.02,3496.02 2084.89,3496.02 2122.76,3533.89 U2.11
PE0: P3.11 U2.3 | length 220.7
  Top Layer w10: P3.11 1902.24,3757.24 U2.3
PE1: P3.10 U2.6 | length 223
  Top Layer w10: P3.10 1820.64,3575.64 1860.64,3575.64 1947.76,3662.76 U2.6
PE2: P2.7 U2.19 | length 487.8
  Top Layer w10: U2.19 2372.24,3662.76 2405,3630 2405,3425 2514.62,3315.38 2514.62,3280.38 P2.7
PE3: P2.8 U2.22 | length 468.2
  Top Layer w10: U2.22 2348.15,3757.24 2430,3675.39 2430,3465 P2.8
RESET: R2.1 SW1.1 U2.29 U4.3 | length 660.8
  Top Layer w10: U2.29 2154.25,3734.68 2301.06,3587.87 2301.06,3511.85 2236.93,3447.72 v1(2236.93,3421.14) 2233.98,3418.19 U4.3
RESET_5V: P4.3 U4.17 | length 640.2
  Top Layer w10: U4.17 2204.53,3065 2204.53,3041.17 2158.3,2994.94 2158.3,2536.7 P4.3
RX: P1.2 U2.30 | length 146.8
  Top Layer w10: U2.30 2122.76,3886.11 2211.65,3975 P1.2@2220,3975
SCK: P2.6 U2.17 U4.2 | length 662.8
  Top Layer w10: U2.17 2333.39,3448.39 2259.57,3374.57 U4.2 2259.96,3300.75 2259.96,3265.04 2350,3175 P2.6
SCK_5V: P4.2 U4.18 | length 678.5
  Top Layer w10: U4.18 2230.12,3065 2230.12,3041.17 2175,2986.05 2175,2976.7 2174.8,2976.5 2174.8,2924.91 2175,2924.72 2175,2620 P4.2
SCL: P2.14 R4.1 U2.28 | length 385
  Top Layer w10: U2.28 2185.75,3888.15 2238.18,3940.58 2390.99,3940.58 2415.41,3965 2510,3965 P2.14
  other v1: 2420,3965
SDA: P2.13 R6.1 U2.27 | length 352.6
  Top Layer w10: U2.27 2217.24,3888.15 2253.07,3923.98 2392.24,3923.98 2412.77,3903.44 2426.56,3903.44 v1(2430,3900) 2487.65,3900 2512.65,3875 P2.13
TX: P1.3 U2.31 | length 113.5
  Top Layer w10: U2.31 2091.26,3937.98 2120,3966.72 P1.3@2120,3975
VBUS: D1.1 J1.A4-B9 J1.B4-A9 | length 624.2
  Top Layer w20: J1.B4-A9@2075.51,4172.8 2077.24,4171.06 2077.24,4147.75 2088.96,4136.04 2250.88,4136.04 2262.6,4147.75 2262.6,4180.91 v1(2264.49,4182.8)
  Bottom Layer w20: v1(2264.49,4182.8) 2264.49,4184.96 2245,4204.45 2245,4255 2274.65,4284.65 D1.1@2520,4284.65
VIN: C6.2 J2.1 P2.1 U3.1 | length 1109.6
  Top Layer w25: J2.1 2430,2290 2520,2380 P2.1
  Bottom Layer w25: U3.1 1831.44,2164.59 1831.44,2211.44 1900,2280 2160,2280 J2.1
  other v1: 1820,2161.18
pads on no net: J1. J1.A6 J1.A7 J1.A8 J1.B6 J1.B7 J1.B8 J2.3 SW1. SW2.M1 SW2.M2 SW2.M3 SW2.M4 SW2.M5 SW2.M6 U4.5 U4.6 U4.7 U4.8 U4.9

## Polygon pours and split planes (outlines as drawn)
GND on Bottom Layer "NONET_L02_P-001" (solid, pour order 0): 1720,4490 2620,4490 2620,1680 1720,1680

## Silkscreen, mask and mechanical layers (free items; w line width, h text height)
Top Overlay:
  text "UART Header" at 2038.79,4096 h25
  text "GND" at 1986.68,4053 h25
  text "TX" at 2099.17,4053 h25
  text "RX" at 2199.17,4053 h25
  text "3V3" at 2286.68,4053 h25
  text "PD2" at 1873,3962.5 h25
  text "SCL" at 2410.35,3952.5 h25
  text "PD3" at 1873,3862.5 h25
  text "SDA" at 2400.35,3862.5 h25
  text "PD4" at 1873,3762.5 h25
  text "PC3" at 2400.35,3762.5 h25
  text "PE0" at 1873,3662.5 h25
  text "PC2" at 2400.35,3662.5 h25
  text "PE1" at 1873,3562.5 h25
  text "PC1" at 2408.69,3562.5 h25
  text "PB6" at 1873,3462.5 h25
  text "PC0" at 2400.35,3462.5 h25
  text "RESET" at 1955.37,3407.5 h25
  text "PE3" at 2410.35,3397.5 h25
  text "PB7" at 1873,3362.5 h25
  text "PD5" at 1873,3262.5 h25
  text "PE2" at 2415.35,3217.5 h25
  text "PD6" at 1873,3162.5 h25
  text "SCK" at 2400.35,3162.5 h25
  text "PD7" at 1873,3062.5 h25
  text "MOSI" at 2383.69,3062.5 h25
  text "IND" at 1954.52,3047.5 h25
  text "Programming Mode" at 1999.56,3002.33 h22
  text "MISO" at 1873,2962.5 h25
  text "PB1" at 2408.69,2962.5 h25
  text "GND" at 1873,2862.5 h25
  text "GND" at 2400.35,2862.5 h25
  text "ON" at 1999.17,2773 h25
  text "OFF" at 2286.68,2773 h25
  text "GND" at 1873,2767.5 h25
  text "5V0" at 2400.35,2762.5 h25
  text "3V3" at 1873,2667.5 h25
  text "VIN" at 2404.52,2662.5 h25
  text "Programming Header" at 1953.4,2594.33 h25
  text "GND" at 1886.68,2543 h25
  text "MISO" at 1976.26,2543 h25
  text "MOSI" at 2078.35,2543 h25
  text "RST" at 2186.68,2543 h25
  text "SCK" at 2286.68,2543 h25
  text "5V0" at 2386.68,2543 h25
  text "5V0" at 2433.34,1985.01 h20
  text "3V3" at 2508.34,1985.01 h20
  text "ATMega" at 1801.95,1950 h30
  text "328p Dev" at 1742.07,1890 h30
  text "Board" at 1832.05,1830 h30
Bottom Overlay:
  text "Designed by" at 2301.21,4171.67 h25
  text "Nicholas" at 2334.95,4102.51 h45
  text "Niles" at 2267.47,4037.51 h45
Mechanical 1:
  the board outline again, w10